# Altium PCB inertial.PcbDoc
Units mil, origin at the board's own origin, x right, y up, seen from the top; angles counter-clockwise.
Board outline 1545.28 x 1056.1 mil, 2 copper layers (Top Layer, Bottom Layer); 12 components, 10 nets, 50 pads, 11 vias.
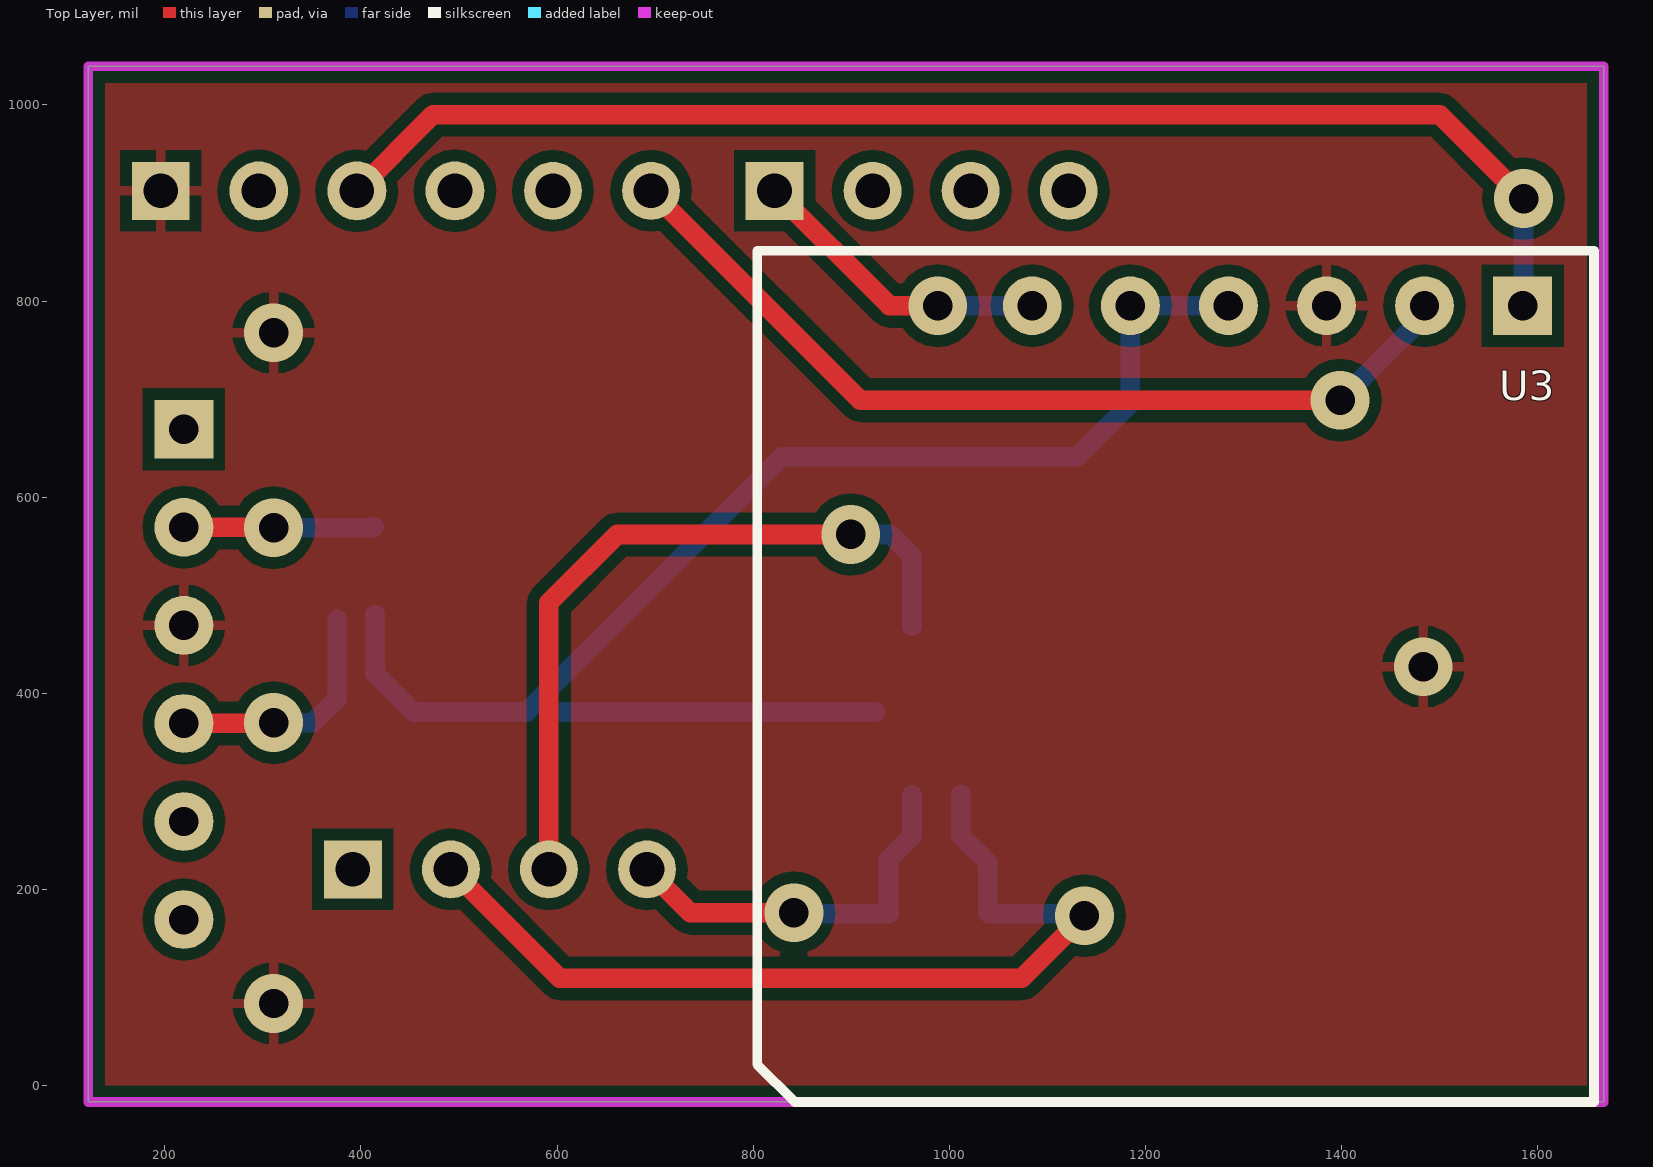
[diagram p0: Top Layer view]
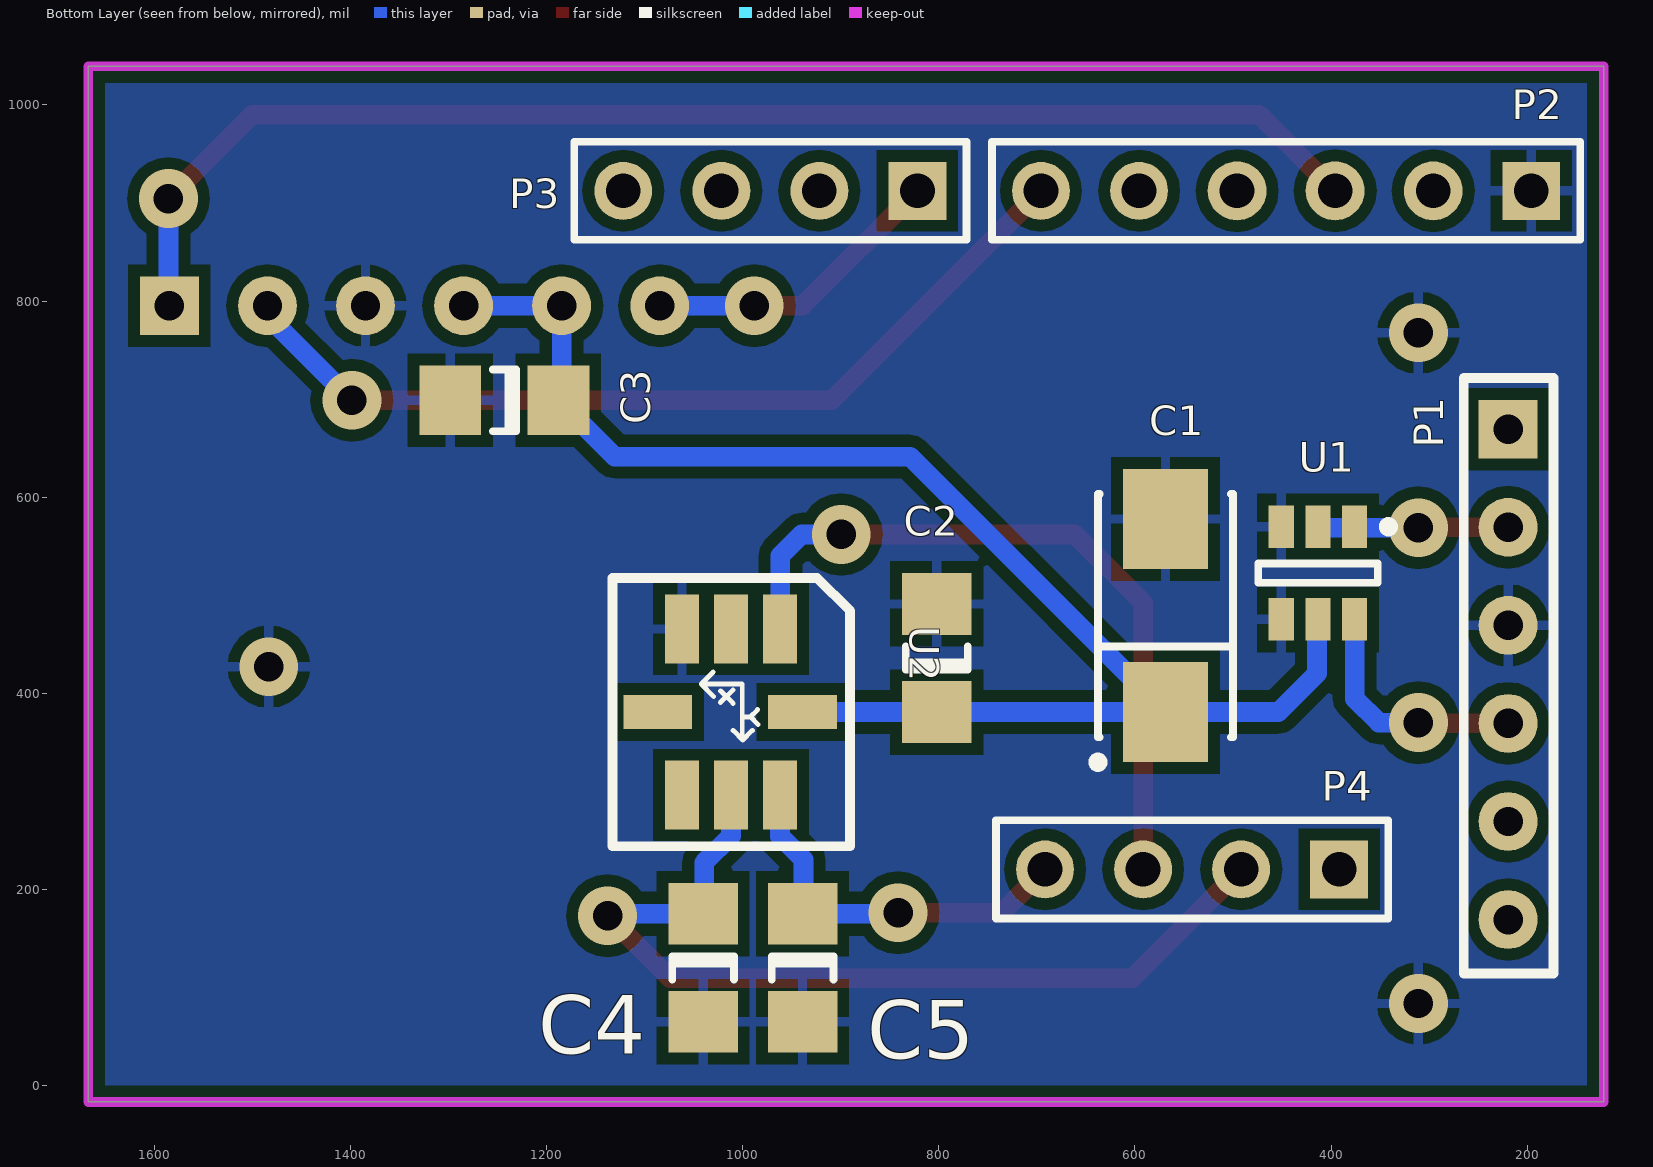
[diagram p1: Bottom Layer view, seen from below]

## Layer stack, top to bottom
Top Layer: signal copper 1.4
Dielectric: dielectric 12.6, FR-4, Dk 4.8
Bottom Layer: signal copper 1.4

## Board outline
122.05,1039.37 1667.32,1039.37 1667.32,-16.73 122.05,-16.73

## Design rules (kind name [scope] priority, off if disabled: settings)
Clearance [All] p1: gap=11.81
ComponentClearance [All] p1: gap=10 collisioncheckmode=3 verticalgap=10 showdistances=TRUE
FabricationTestpoint [(IsPad And (OnTopLayer Or OnBottomLayer)) Or (IsVia)] p1: side=3 testpointundercomponent=TRUE minsize=40 maxsize=100 preferedsize=60 minholesize=0 maxholesize=40 preferedholesize=32 testpointgrid=1 allowsidetop=TRUE allowsidebottom=TRUE usegrid=TRUE gridtolerance=0.01 minspacing=10 compbodyclearance=10 boardedgeclearance=10
PolygonConnect [All] p1: connectstyle=Relief reliefconductorwidth=10 reliefentries=4 polygonreliefangle="90 Angle"
RoutingVias [All] p1: holewidth=30 width=60 viastyle="Through Hole" minholewidth=28 minwidth=60 maxholewidth=35 maxwidth=60
SilkscreenOverComponentPads [All] p1: minsilkscreentomaskgap=10
SolderMaskExpansion [All] p1: expansion=8
Width [All] p1: maxlimit=20 minlimit=12 preferedwidth=20 minimp=50.000000 maximp=50.000000 favimp=50.000000 checkconnectedcopper=TRUE
25 further rules are at their usual default settings.

## Components (designator, comment, footprint, x,y, rotation, side; value= is the part's Value field where it differs from the comment)
C1 "T491C" C 568.9,479.33 r90 bottom (schematic designator C4)
C2 "Cap" C1206 802.17,436.02 r90 bottom
C3 "Cap" C1206 1243.11,698.82 r0 bottom
C4 "Cap" C1206 1040.35,120.08 r270 bottom
C5 "Cap" C1206 938.98,120.08 r270 bottom
P1 "PicKit2" PICKIT3 219.49,669.29 r270 bottom locked
P2 "Header 6" HDR1X6 195.87,912.4 r0 bottom
P3 "Header 4" HDR1X4 821.85,912.4 r0 bottom
P4 "Header 4" HDR1X4 391.73,220.47 r0 bottom
U1 "ADG 601" SOT26A-6N 413.39,522.64 r270 bottom (schematic designator U3)
U2 "ADXL-203" ADXL-203 1012.8,380.91 r270 bottom
U3 "UP501-GPS" UP501-GPS 868.11,751.97 r270 top

## Footprints (in the part's own frame and the unit in brackets; to place one, negate y for a bottom-side part, rotate by r counter-clockwise, add the part's x,y. Pads: shape width x height; smd on the part's side, far side on the other; paste and mask are expansions set on the pad)
ADXL-203 [mil]
  rect 70x35 smd: 1(-84.65,50.79) 2(-84.65,0.79) 3(-84.65,-49.21) 5(84.65,-49.21) 6(84.65,0.79) 7(84.65,50.79)
  rect 35x70 smd: 4(0,-73.82) 8(0,73.82)
  silkscreen extent -137,-120 137,122
C [mm] "Capacitor, SM Tantalum; Body 6.0 x 3.2 mm (LxW typ)"
  rect 2.6x2.2 smd: 1(-2.5,0) 2(2.5,0)
  silkscreen extent -3.92,-1.75 3.15,1.88
C1206 [mm] "Chip Capacitor; Body 3.2 x 1.6 mm (LxW typ)"
  rect 1.6x1.8 smd: 1(-1.4,0) 2(1.4,0)
  silkscreen extent -0.3,-0.8 0.3,0.8
HDR1X4 [mm] "Connector; Header; 4 Position"
  rect 1.5x1.5 hole 0.9: 1(0,0)
  round 1.5 hole 0.9: 2(2.54,0) 3(5.08,0) 4(7.62,0)
  silkscreen extent -1.27,-1.27 8.89,1.27
HDR1X6 [mm] "Connector; Header; 6 Position"
  rect 1.5x1.5 hole 0.9: 1(0,0)
  round 1.524 hole 0.9: 2(2.54,0) 3(5.08,0) 4(7.62,0)
  round 1.5 hole 0.9: 5(10.16,0) 6(12.7,0)
  silkscreen extent -1.27,-1.27 13.97,1.27
PICKIT3 [mil]
  rect 60x60 hole 30: 1(0,0)
  round 60 hole 30: 2(100,0) 3(200,0) 4(300,0) 5(400,0) 6(500,0)
  silkscreen extent -52,-45 555,46
SOT26A-6N [mm] "SOT23, 6-Leads, Body 2.9x1.7mm, Pitch 0.95mm, Lead Span 2.8mm, IPC Medium Density"
  rect 1.1x0.65 smd: 1(-1.2,0.95) 2(-1.2,0) 3(-1.2,-0.95) 4(1.2,-0.95) 5(1.2,0) 6(1.2,0.95)
  silkscreen extent -1.32,-1.55 0.25,1.95, body extent -0.9,-1.55 0.9,1.55, height 1.45
UP501-GPS [mil]
  rect 60x60 hole 30: 1(-43.31,716.54)
  round 60 hole 30: 2(-43.31,616.54) 3(-43.31,516.54) 4(-43.31,416.54) 5(-43.31,316.54) 6(-43.31,216.54)
  silkscreen extent -99,-64 769,789, body extent -71,689 -16,744, height 394

## Part data
C1: "Solid Tantalum Chip Capacitor, Standard T491 Series - Industrial Grade"
C2 C3 C4 C5: "Capacitor"
P2: "Header, 6-Pin"
P3 P4: "Header, 4-Pin"

## Via types
v1: diameter 60, hole 30, Top Layer to Bottom Layer, 11 vias

## Nets (pads, with @x,y where several pads share a name; then routed paths per layer and width w, separated by ;. In a path a pad name is that pad's centre, name@x,y a point inside that pad or via, vN(x,y) a via of type N, cw(c..) or ccw(c..) an arc to the next point about the centre after c; other vN are vias at no path point)
GND: C1.2 C2.2 C3.2 C4.2 C5.2 P1.3 P2.1 U1.3 U1.4 U2.3 U3.3
  other v1: 311.02,83.66 1483.27,427.17 311.02,767.72
NetC4_1: C4.1 P4.2 U2.6 | length 949.7
  Top Layer w20: P4.2 602.95,109.25 632.87,109.25 1073.82,109.25 v1(1137.8,173.23)
  Bottom Layer w20: U2.6 1012.01,254.72 1039.37,227.36 1039.37,176.18 C4.1 1135.83,175.2 v1(1137.8,173.23)
NetC5_1: C5.1 P4.4 U2.7 | length 397.4
  Top Layer w20: P4.4 736.02,176.18 v1(841.54,176.18)
  Bottom Layer w20: v1(841.54,176.18) 842.52,175.2 C5.1 937.99,176.18 937.99,230.32 962.01,254.33 U2.7
NetP1_4: P1.4 U1.6 | length 247.7
  Top Layer w20: P1.4 310.24,369.29 v1(311.02,370.08)
  Bottom Layer w20: v1(311.02,370.08) 351.38,370.08 375.98,394.68 U1.6
NetP2_3: P2.3 U3.1 | length 1358.2
  Top Layer w20: P2.3 473.62,990.16 1500,990.16 v1(1585.63,904.53)
  Bottom Layer w20: U3.1@1584.65,804.13 1585.63,805.12 v1(1585.63,904.53)
NetP2_6: P2.6 U3.2 | length 923.3
  Top Layer w20: P2.6 909.45,698.82 v1(1398.62,698.82)
  Bottom Layer w20: v1(1398.62,698.82) 1484.65,784.84 U3.2
NetP3_1: P3.1 U3.6 | length 312.3
  Top Layer w20: P3.1 938.98,795.28 v1(988.19,795.28)
  Bottom Layer w20: v1(988.19,795.28) U3.6@1085.63,795.28
NetP4_3: P4.3 U2.1 | length 751.7
  Top Layer w20: P4.3@591.54,220.47 591.54,492.13 661.42,562.01 v1(899.61,562.01)
  Bottom Layer w20: v1(899.61,562.01) 939.96,562.01 961.61,540.35 961.61,468.9 U2.1@962.01,468.5
VCC: C1.1 C2.1 C3.1 U1.5 U2.8 U3.4 U3.5 | length 1516.3
  Bottom Layer w20: U1.5@414.37,480.32 414.37,420.28 453.74,380.91 C1.1 829.37,641.38 1130.55,641.38 1184.65,695.47 U3.5 1293.5,795.28 U3.4@1284.45,804.33 ; C1.1@606.3,380.91 U2.8@924.21,380.91
VCC-IN: P1.2 U1.1 U1.2 | length 194.5
  Top Layer w20: P1.2 297.83,569.29 298.23,568.9 v1(311.02,568.9)
  Bottom Layer w20: v1(311.02,568.9) 412.4,568.9 U1.2
pads on no net: P1.1 P1.5 P1.6 P2.2 P2.4 P2.5 P3.2 P3.3 P3.4 P4.1 U2.2 U2.4 U2.5

## Polygon pours and split planes (outlines as drawn)
GND on Top Layer "GND_PLANE" (solid, remove dead copper, pour order 7): 122.05,1039.37 1667.32,1039.37 1667.32,-9.84 1660.43,-16.73 122.05,-16.73
GND on Bottom Layer "GND_PLANE" (solid, remove dead copper, pour order 7): 122.05,1039.37 1667.32,1039.37 1667.32,-9.84 1660.43,-16.73 122.05,-16.73

## Keep-outs
Keep-Out Layer:
  the board outline again, w10

## Dimensions
122.05,-16.73 to 1667.32,-16.73 on Keep-Out Layer
122.05,1039.37 to 122.05,-16.73 on Keep-Out Layer